# Altium PCB PCB2.PcbDoc
Units mil, origin at the board's own origin, x right, y up, seen from the top; angles counter-clockwise.
Board outline 6000 x 4000 mil, 8 copper layers (Top Layer, Int1 (Sign), Int2 (GND), Int3 (Sign), Int4 (Sign), Int5 (PWR), Int6 (Sign), Bottom Layer), stack 60.424 mil thick; 77 components, 234 nets, 364 pads, 0 vias.
Unrouted connection lines stored in the file: 131.
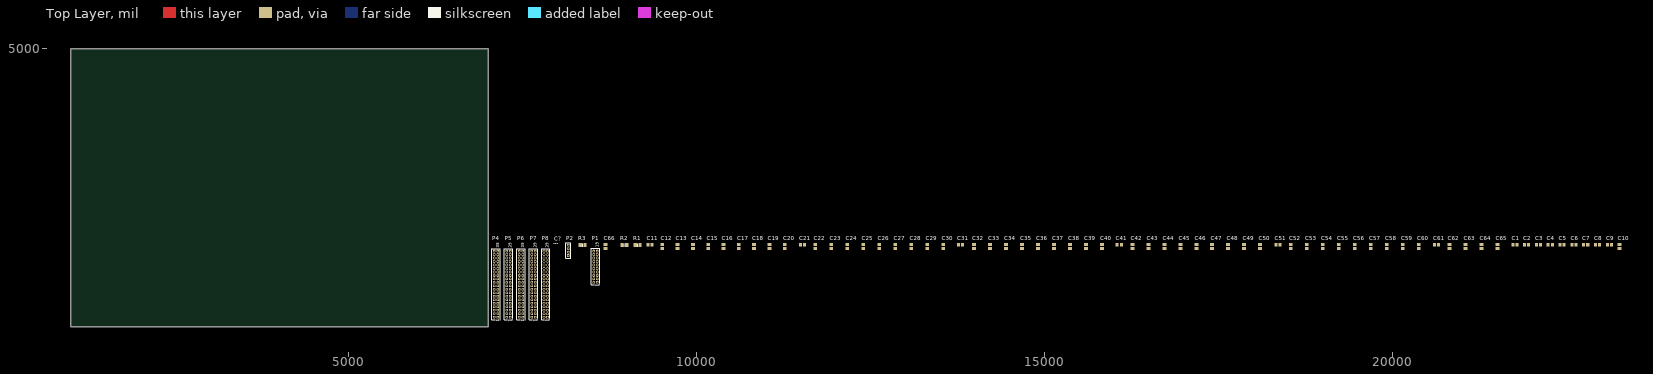
[diagram p0: Top Layer view]
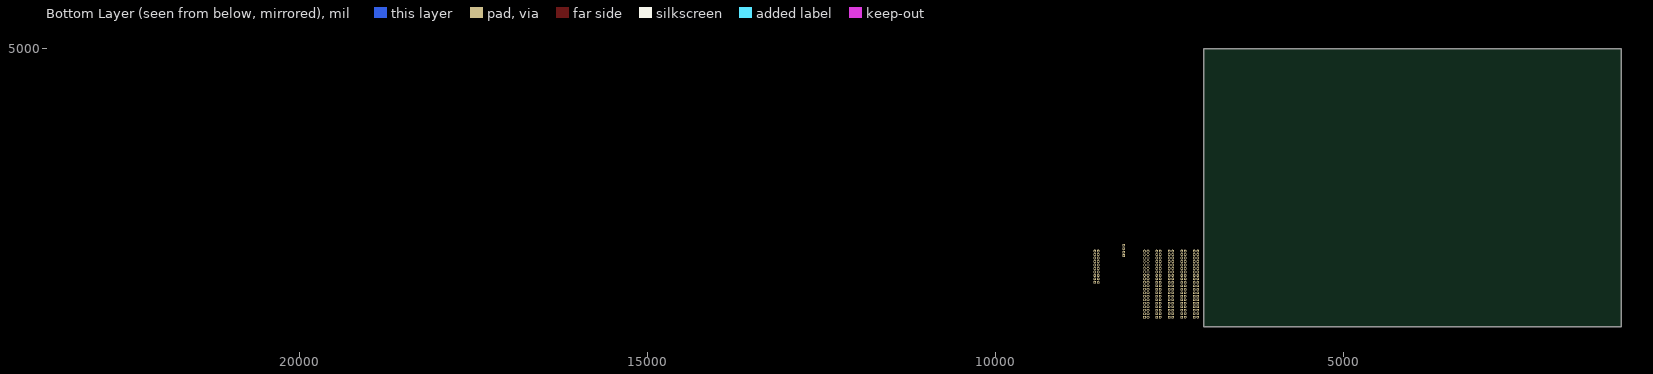
[diagram p1: Bottom Layer view, seen from below]
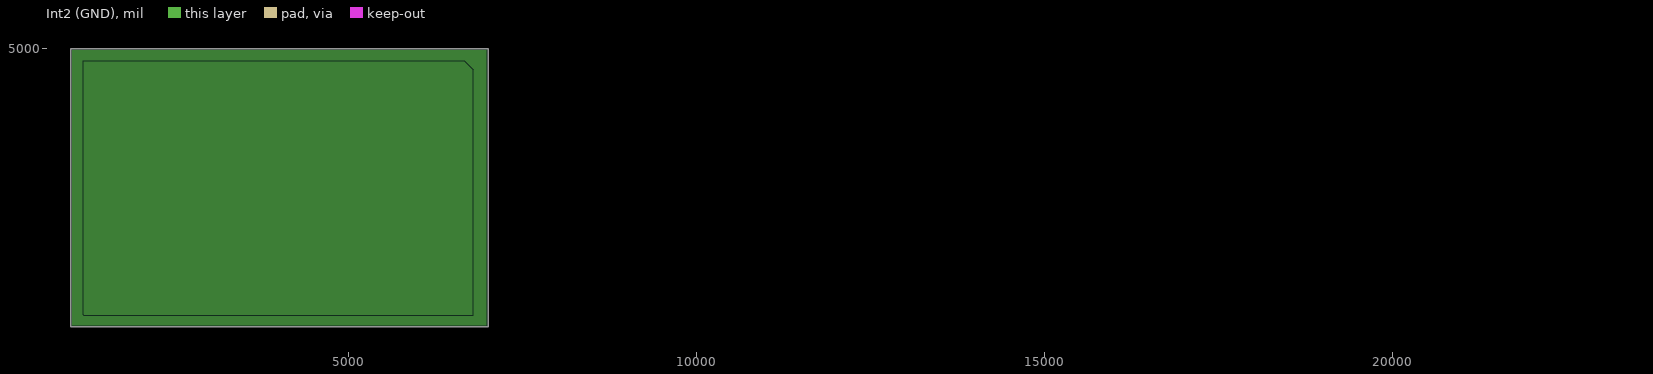
[diagram p2: Int2 (GND), clearances drawn from the general rule]
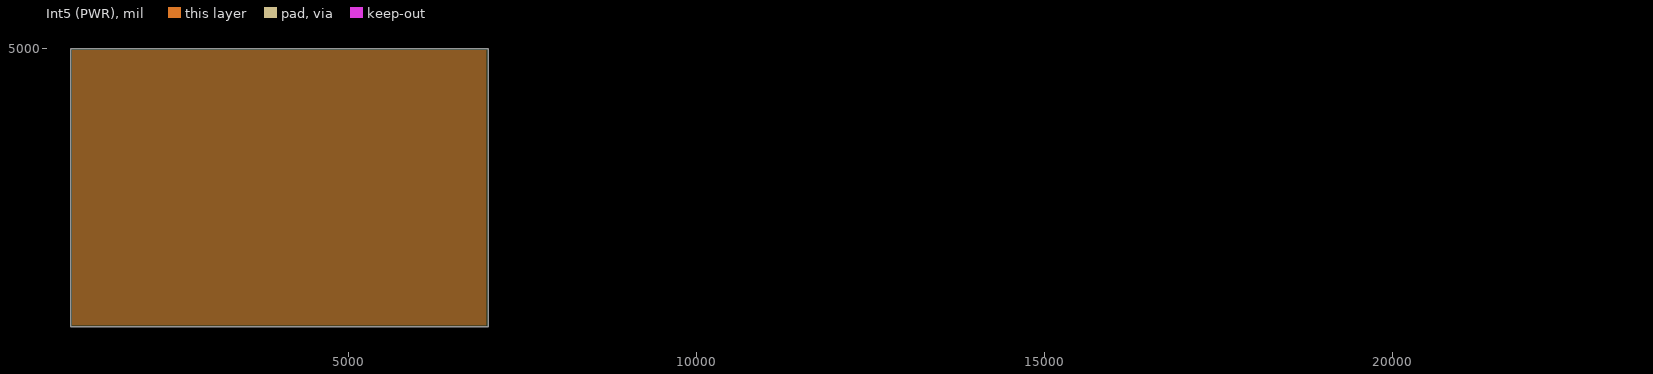
[diagram p3: Int5 (PWR), clearances drawn from the general rule]

## Layer stack, top to bottom
Top Solder: solder mask 1, SM-001, Dk 4
Top Layer: signal copper 1.378
Dielectric 1: prepreg 2.8, PP-006, Dk 4.1
Dielectric 2: prepreg 2.8, PP-006, Dk 4.1
Int1 (Sign): signal copper 1.378
Dielectric 3: core 9, Core-027, Dk 4.5
Int2 (GND): plane copper 1.378
Dielectric 4: prepreg 2.8, PP-006, Dk 4.1
Dielectric 5: prepreg 2.8, PP-006, Dk 4.1
Int3 (Sign): signal copper 1.378
Dielectric 6: core 9, Core-027, Dk 4.5
Int4 (Sign): signal copper 1.378
Dielectric 7: prepreg 2.8, PP-006, Dk 4.1
Dielectric 8: prepreg 2.8, PP-006, Dk 4.1
Int5 (PWR): plane copper 1.378
Dielectric 9: core 9, Core-027, Dk 4.5
Int6 (Sign): signal copper 1.378
Dielectric 10: prepreg 2.8, PP-006, Dk 4.1
Dielectric 11: prepreg 2.8, PP-006, Dk 4.1
Bottom Layer: signal copper 1.378
Bottom Solder: solder mask 1, SM-001, Dk 4

## Board outline
1000,1000 7000,1000 7000,5000 1000,5000

## Design rules (kind name [scope] priority, off if disabled: settings)
Clearance [All] p1: gap=10 ignorepadtopadclearanceinfootprint=FALSE except(0: Arc-Hole Track-Hole SMDPad-Hole THPad-Hole Via-Hole Fill-Hole Poly-Hole Region-Hole Text-Hole)
PlaneClearance [All] p1: clearance=20
PlaneConnect [All] p1: planeconnectstyle=Relief reliefexpansion=20 reliefentries=4 reliefconductorwidth=10 reliefairgap=10
PolygonConnect [All] p1: connectstyle=Relief reliefconductorwidth=10 reliefentries=4 polygonreliefangle="90 Angle" airgapwidth=10
RoomDefinition SlaveBoard_2020 [InComponentClass('SlaveBoard_2020')] p1: confinementstyle=ConfineIn formatcopy=TRUE lockcomponents=FALSE outline 7045,1060 23410,1060 23410,2320 7045,2320
RoutingVias [All] p1: holewidth=28 width=50 viastyle="Through Hole" minholewidth=28 minwidth=50 maxholewidth=28 maxwidth=50
SolderMaskExpansion [All] p1: expansion=4 istentingtop=FALSE
Width [All] p1: maxlimit=10 minlimit=10 preferedwidth=10
28 further rules are at their usual default settings.

## Components (designator, comment, footprint, x,y, rotation, side; value= is the part's Value field where it differs from the comment)
C1 "30pF" c0805 21765,2180 r0 top
C2 "30pF" c0805 21930,2180 r0 top
C3 "30pF" c0805 22100,2180 r0 top
C4 "30pF" c0805 22270,2180 r0 top
C5 "30pF" c0805 22440,2180 r0 top
C6 "30pF" c0805 22610,2180 r0 top
C7 "30pF" c0805 22780,2180 r0 top
C8 "30pF" c0805 22950,2180 r0 top
C9 "30pF" c0805 23120,2180 r0 top
C10 "30pF" c0805 23265,2155 r90 top
C11 "100nF" c0805 9330,2180 r0 top
C12 "100nF" c0805 9505,2155 r90 top
C13 "100nF" c0805 9725,2155 r90 top
C14 "100nF" c0805 9945,2155 r90 top
C15 "100nF" c0805 10165,2155 r90 top
C16 "100nF" c0805 10385,2155 r90 top
C17 "100nF" c0805 10605,2155 r90 top
C18 "100nF" c0805 10825,2155 r90 top
C19 "100nF" c0805 11045,2155 r90 top
C20 "100nF" c0805 11265,2155 r90 top
C21 "100nF" c0805 11520,2180 r0 top
C22 "100nF" c0805 11705,2155 r90 top
C23 "100nF" c0805 11935,2155 r90 top
C24 "100nF" c0805 12165,2155 r90 top
C25 "100nF" c0805 12395,2155 r90 top
C26 "100nF" c0805 12625,2155 r90 top
C27 "100nF" c0805 12855,2155 r90 top
C28 "100nF" c0805 13085,2155 r90 top
C29 "100nF" c0805 13315,2155 r90 top
C30 "100nF" c0805 13545,2155 r90 top
C31 "100nF" c0805 13795,2180 r0 top
C32 "100nF" c0805 13985,2155 r90 top
C33 "100nF" c0805 14215,2155 r90 top
C34 "100nF" c0805 14445,2155 r90 top
C35 "100nF" c0805 14675,2155 r90 top
C36 "100nF" c0805 14905,2155 r90 top
C37 "100nF" c0805 15135,2155 r90 top
C38 "100nF" c0805 15365,2155 r90 top
C39 "100nF" c0805 15595,2155 r90 top
C40 "100nF" c0805 15825,2155 r90 top
C41 "100nF" c0805 16075,2180 r0 top
C42 "100nF" c0805 16265,2155 r90 top
C43 "100nF" c0805 16495,2155 r90 top
C44 "100nF" c0805 16725,2155 r90 top
C45 "100nF" c0805 16955,2155 r90 top
C46 "100nF" c0805 17185,2155 r90 top
C47 "100nF" c0805 17410,2155 r90 top
C48 "100nF" c0805 17640,2155 r90 top
C49 "100nF" c0805 17870,2155 r90 top
C50 "100nF" c0805 18100,2155 r90 top
C51 "100nF" c0805 18355,2180 r0 top
C52 "100nF" c0805 18540,2155 r90 top
C53 "100nF" c0805 18770,2155 r90 top
C54 "100nF" c0805 19000,2155 r90 top
C55 "100nF" c0805 19230,2155 r90 top
C56 "100nF" c0805 19460,2155 r90 top
C57 "100nF" c0805 19690,2155 r90 top
C58 "100nF" c0805 19920,2155 r90 top
C59 "100nF" c0805 20150,2155 r90 top
C60 "100nF" c0805 20380,2155 r90 top
C61 "100nF" c0805 20635,2180 r0 top
C62 "100nF" c0805 20820,2155 r90 top
C63 "100nF" c0805 21050,2155 r90 top
C64 "100nF" c0805 21280,2155 r90 top
C65 "100nF" c0805 21510,2155 r90 top
C66 "100nF" c0805 8690,2155 r90 top
C? "10uF" 0603 7985,2200 r0 top
P1 "MHDR2X10" MHDR2X10 8570,1640 r90 top
P2 "MHDR1X4" MHDR1X4 8155,2025 r90 top
P4 "MHDR2X20" MHDR2X20 7140,1140 r90 top
P5 "MHDR2X20" MHDR2X20 7320,1140 r90 top
P6 "MHDR2X20" MHDR2X20 7500,1140 r90 top
P7 "MHDR2X20" MHDR2X20 7680,1140 r90 top
P8 "MHDR2X20" MHDR2X20 7855,1140 r90 top
R1 "10K" 6-0805_N 9150,2175 r0 top value=100K
R2 "10K" 6-0805_N 8960,2175 r0 top
R3 "10k" 6-0805_N 8360,2175 r0 top

## Footprints (in the part's own frame and the unit in brackets; to place one, negate y for a bottom-side part, rotate by r counter-clockwise, add the part's x,y. Pads: shape width x height; smd on the part's side, far side on the other; paste and mask are expansions set on the pad)
6-0805_N [mm] "Chip Resistor, Body 2.0x1.2mm, IPC Medium Density"
  rect 1.2x1.4 smd: 1(-0.9,0) 2(0.9,0)
  silkscreen extent 0,-0.6 0,0.6, body extent -1.07,-0.7 1.07,0.7, height 0.7
0603 [mm] "Chip Inductor, Body 0.6x0.3mm, IPC High Density"
  rect 0.5x0.3 smd: 1(-0.35,0) 2(0.35,0)
  silkscreen extent -0.9,-0.05 -0.9,0.05, body extent -0.33,-0.18 0.33,0.18, height 0.55
c0805 [mm] "Chip Capacitor, Body 2.0x1.3mm, IPC High Density"
  rect 1.1x1.4 smd: 1(-0.75,0) 2(0.75,0)
  body extent -1.1,-0.72 1.1,0.72, height 1.4
MHDR1X4 [mm] "Connector; Header; 4 Position"
  rect 1x1 hole 0.6: 1(0,0)
  round 1 hole 0.6: 2(1.27,0) 3(2.54,0) 4(3.81,0)
  silkscreen extent -0.9,-0.9 4.71,0.9
MHDR2X10 [mm] "Connector; Header; 10x2 Position"
  rect 1x1 hole 0.6: 1(0,0)
  round 1 hole 0.6: 2(0,1.27) 3(1.27,0) 4(1.27,1.27) 5(2.54,0) 6(2.54,1.27) 7(3.81,0) 8(3.81,1.27) 9(5.08,0) 10(5.08,1.27) 11(6.35,0) 12(6.35,1.27) 13(7.62,0) 14(7.62,1.27) 15(8.89,0) 16(8.89,1.27) 17(10.16,0) 18(10.16,1.27) 19(11.43,0) 20(11.43,1.27)
  silkscreen extent -0.9,-0.9 12.43,2.17
MHDR2X20 [mm] "Connector; Header; 20x2 Position"
  rect 1x1 hole 0.6: 1(0,0)
  round 1 hole 0.6: 2(0,1.27) 3(1.27,0) 4(1.27,1.27) 5(2.54,0) 6(2.54,1.27) 7(3.81,0) 8(3.81,1.27) 9(5.08,0) 10(5.08,1.27) 11(6.35,0) 12(6.35,1.27) 13(7.62,0) 14(7.62,1.27) 15(8.89,0) 16(8.89,1.27) 17(10.16,0) 18(10.16,1.27) 19(11.43,0) 20(11.43,1.27) 21(12.7,0) 22(12.7,1.27) 23(13.97,0) 24(13.97,1.27) 25(15.24,0) 26(15.24,1.27) 27(16.51,0) 28(16.51,1.27) 29(17.78,0) 30(17.78,1.27) 31(19.05,0) 32(19.05,1.27) 33(20.32,0) 34(20.32,1.27) 35(21.59,0) 36(21.59,1.27) 37(22.86,0) 38(22.86,1.27) 39(24.13,0) 40(24.13,1.27)
  silkscreen extent -0.9,-0.9 25.03,2.17

## Part data
C1 C2 C3 C4 C5 C6 C7 C8 C9 C10: library part CP1
C11 C12 C13 C14 C15 C16 C17 C18 C19 C20 C21 C22 C23 C24 C25 C26 C27 C28 C29 C30 C31 C32 C33 C34 C35 C36 C37 C38 C39 C40 C41 C42 C43 C44 C45 C46 C47 C48 C49 C50 C51 C52 C53 C54 C55 C56 C57 C58 C59 C60 C61 C62 C63 C64 C65: library part Cap_0805
C66 C?: library part C
P1: "Header, 10-Pin, Dual row", LatestRevisionDate=17-Jul-2002, LatestRevisionNote="Re-released for DXP Platform.", Publisher="Altium Limited"
P2: "Header, 4-Pin", LatestRevisionDate=17-Jul-2002, LatestRevisionNote="Re-released for DXP Platform.", Publisher="Altium Limited"
P4 P5 P6 P7 P8: "Header, 20-Pin, Dual row", LatestRevisionDate=17-Jul-2002, LatestRevisionNote="Re-released for DXP Platform.", Publisher="Altium Limited"
R1 R2 R3: library part R

## Nets (pads, with @x,y where several pads share a name; then routed paths per layer and width w, separated by ;. In a path a pad name is that pad's centre, name@x,y a point inside that pad or via, vN(x,y) a via of type N, cw(c..) or ccw(c..) an arc to the next point about the centre after c; other vN are vias at no path point)
1_AD1_IN1: P4.1
1_AD1_IN2: P4.3
1_AD1_IN3: P4.5
1_AD1_IN4: P4.7
1_AD1_IN5: P4.9
1_AD1_IN6: P4.11
1_AD1_IN7: P4.13
1_AD1_IN8: P4.15
1_AD1_IN9: P4.17
1_AD1_IN10: P4.19
1_AD1_IN14: P4.21
1_AD2_IN1: P4.23
1_AD2_IN2: P4.25
1_AD2_IN3: P4.27
1_AD2_IN4: P4.29
1_AD2_IN5: P4.31
1_AD2_IN11: P4.33
1_AD2_IN12: P4.35
1_AD3_IN1: P4.37
1_AD3_IN2: P4.39
1_AD3_IN3: P4.2
1_AD3_IN5: P4.4
1_AD3_IN6: P4.6
1_AD3_IN7: P4.8
1_AD3_IN8: P4.10
1_AD3_IN9: P4.12
1_AD3_IN10: P4.14
1_AD3_IN11: P4.16
1_AD3_IN12: P4.18
1_AD3_IN13: P4.20
1_AD3_IN14: P4.22
1_AD3_IN15: P4.24
1_AD3_IN16: P4.26
1_AD4_IN1: P4.28
1_AD4_IN2: P4.30
1_AD4_IN3: P4.32
1_AD4_IN4: P4.34
1_AD4_IN5: P4.36
1_AD4_IN12: P4.38
1_AD4_IN13: P4.40
1_BOOT0: R1.2
1_NRST: C66.1 R2.1
1_SPI_MISO: P1.3
1_SPI_MOSI: P1.5
1_SPI_SCK: P1.1
1_SWCLK: P2.1
1_SWDIO: P2.2 R3.2
2_AD1_IN1: P5.1
2_AD1_IN2: P5.3
2_AD1_IN3: P5.5
2_AD1_IN4: P5.7
2_AD1_IN5: P5.9
2_AD1_IN6: P5.11
2_AD1_IN7: P5.13
2_AD1_IN8: P5.15
2_AD1_IN9: P5.17
2_AD1_IN10: P5.19
2_AD1_IN14: P5.21
2_AD2_IN1: P5.23
2_AD2_IN2: P5.25
2_AD2_IN3: P5.27
2_AD2_IN4: P5.29
2_AD2_IN5: P5.31
2_AD2_IN11: P5.33
2_AD2_IN12: P5.35
2_AD3_IN1: P5.37
2_AD3_IN2: P5.39
2_AD3_IN3: P5.2
2_AD3_IN5: P5.4
2_AD3_IN6: P5.6
2_AD3_IN7: P5.8
2_AD3_IN8: P5.10
2_AD3_IN9: P5.12
2_AD3_IN10: P5.14
2_AD3_IN11: P5.16
2_AD3_IN12: P5.18
2_AD3_IN13: P5.20
2_AD3_IN14: P5.22
2_AD3_IN15: P5.24
2_AD3_IN16: P5.26
2_AD4_IN1: P5.28
2_AD4_IN2: P5.30
2_AD4_IN3: P5.32
2_AD4_IN4: P5.34
2_AD4_IN5: P5.36
2_AD4_IN12: P5.38
2_AD4_IN13: P5.40
2_SPI_MISO: P1.11
2_SPI_MOSI: P1.13
2_SPI_SCK: P1.9
3.3V: C11.1 C12.1 C13.1 C14.1 C15.1 C16.1 C17.1 C18.1 C19.1 C20.1 C21.1 C22.1 C23.1 C24.1 C25.1 C26.1 C27.1 C28.1 C29.1 C30.1 C31.1 C32.1 C33.1 C34.1 C35.1 C36.1 C37.1 C38.1 C39.1 C40.1 C41.1 C42.1 C43.1 C44.1 C45.1 C46.1 C47.1 C48.1 C49.1 C50.1 C51.1 C52.1 C53.1 C54.1 C55.1 C56.1 C57.1 C58.1 C59.1 C60.1 C61.1 C62.1 C63.1 C64.1 C65.1 P2.3 R2.2 R3.1
3_AD1_IN1: P6.1
3_AD1_IN2: P6.3
3_AD1_IN3: P6.5
3_AD1_IN4: P6.7
3_AD1_IN5: P6.9
3_AD1_IN6: P6.11
3_AD1_IN7: P6.13
3_AD1_IN8: P6.15
3_AD1_IN9: P6.17
3_AD1_IN10: P6.19
3_AD1_IN14: P6.21
3_AD2_IN1: P6.23
3_AD2_IN2: P6.25
3_AD2_IN3: P6.27
3_AD2_IN4: P6.29
3_AD2_IN5: P6.31
3_AD2_IN11: P6.33
3_AD2_IN12: P6.35
3_AD3_IN1: P6.37
3_AD3_IN2: P6.39
3_AD3_IN3: P6.2
3_AD3_IN5: P6.4
3_AD3_IN6: P6.6
3_AD3_IN7: P6.8
3_AD3_IN8: P6.10
3_AD3_IN9: P6.12
3_AD3_IN10: P6.14
3_AD3_IN11: P6.16
3_AD3_IN12: P6.18
3_AD3_IN13: P6.20
3_AD3_IN14: P6.22
3_AD3_IN15: P6.24
3_AD3_IN16: P6.26
3_AD4_IN1: P6.28
3_AD4_IN2: P6.30
3_AD4_IN3: P6.32
3_AD4_IN4: P6.34
3_AD4_IN5: P6.36
3_AD4_IN12: P6.38
3_AD4_IN13: P6.40
3_SPI_MISO: P1.19
3_SPI_MOSI: P1.20
3_SPI_SCK: P1.17
4_AD1_IN1: P7.1
4_AD1_IN2: P7.3
4_AD1_IN3: P7.5
4_AD1_IN4: P7.7
4_AD1_IN5: P7.9
4_AD1_IN6: P7.11
4_AD1_IN7: P7.13
4_AD1_IN8: P7.15
4_AD1_IN9: P7.17
4_AD1_IN10: P7.19
4_AD1_IN14: P7.21
4_AD2_IN1: P7.23
4_AD2_IN2: P7.25
4_AD2_IN3: P7.27
4_AD2_IN4: P7.29
4_AD2_IN5: P7.31
4_AD2_IN11: P7.33
4_AD2_IN12: P7.35
4_AD3_IN1: P7.37
4_AD3_IN2: P7.39
4_AD3_IN3: P7.2
4_AD3_IN5: P7.4
4_AD3_IN6: P7.6
4_AD3_IN7: P7.8
4_AD3_IN8: P7.10
4_AD3_IN9: P7.12
4_AD3_IN10: P7.14
4_AD3_IN11: P7.16
4_AD3_IN12: P7.18
4_AD3_IN13: P7.20
4_AD3_IN14: P7.22
4_AD3_IN15: P7.24
4_AD3_IN16: P7.26
4_AD4_IN1: P7.28
4_AD4_IN2: P7.30
4_AD4_IN3: P7.32
4_AD4_IN4: P7.34
4_AD4_IN5: P7.36
4_AD4_IN12: P7.38
4_AD4_IN13: P7.40
4_SPI_MISO: P1.14
4_SPI_MOSI: P1.16
4_SPI_SCK: P1.12
5_AD1_IN1: P8.1
5_AD1_IN2: P8.3
5_AD1_IN3: P8.5
5_AD1_IN4: P8.7
5_AD1_IN5: P8.9
5_AD1_IN6: P8.11
5_AD1_IN7: P8.13
5_AD1_IN8: P8.15
5_AD1_IN9: P8.17
5_AD1_IN10: P8.19
5_AD1_IN14: P8.21
5_AD2_IN1: P8.23
5_AD2_IN2: P8.25
5_AD2_IN3: P8.27
5_AD2_IN4: P8.29
5_AD2_IN5: P8.31
5_AD2_IN11: P8.33
5_AD2_IN12: P8.35
5_AD3_IN1: P8.37
5_AD3_IN2: P8.39
5_AD3_IN3: P8.2
5_AD3_IN5: P8.4
5_AD3_IN6: P8.6
5_AD3_IN7: P8.8
5_AD3_IN8: P8.10
5_AD3_IN9: P8.12
5_AD3_IN10: P8.14
5_AD3_IN11: P8.16
5_AD3_IN12: P8.18
5_AD3_IN13: P8.20
5_AD3_IN14: P8.22
5_AD3_IN15: P8.24
5_AD3_IN16: P8.26
5_AD4_IN1: P8.28
5_AD4_IN2: P8.30
5_AD4_IN3: P8.32
5_AD4_IN4: P8.34
5_AD4_IN5: P8.36
5_AD4_IN12: P8.38
5_AD4_IN13: P8.40
5_SPI_MISO: P1.6
5_SPI_MOSI: P1.8
5_SPI_SCK: P1.4
GND: C1.2 C2.2 C3.2 C4.2 C5.2 C6.2 C7.2 C8.2 C9.2 C10.2 C11.2 C12.2 C13.2 C14.2 C15.2 C16.2 C17.2 C18.2 C19.2 C20.2 C21.2 C22.2 C23.2 C24.2 C25.2 C26.2 C27.2 C28.2 C29.2 C30.2 C31.2 C32.2 C33.2 C34.2 C35.2 C36.2 C37.2 C38.2 C39.2 C40.2 C41.2 C42.2 C43.2 C44.2 C45.2 C46.2 C47.2 C48.2 C49.2 C50.2 C51.2 C52.2 C53.2 C54.2 C55.2 C56.2 C57.2 C58.2 C59.2 C60.2 C61.2 C62.2 C63.2 C64.2 C65.2 C66.2 P1.2 P1.7 P1.10 P1.15 P1.18 P2.4 R1.1
NetC1_1: C1.1
NetC2_1: C2.1
NetC3_1: C3.1
NetC4_1: C4.1
NetC5_1: C5.1
NetC6_1: C6.1
NetC7_1: C7.1
NetC8_1: C8.1
NetC9_1: C9.1
NetC10_1: C10.1
NetC?_1: C?.1
NetC?_2: C?.2
NetL1_1: 

## Polygon pours and split planes (outlines as drawn)
no net on Int5 (PWR) (split plane): 6979.9,1020.1 1020.1,1020.1 1020.1,4979.9 6979.9,4979.9
no net on Int2 (GND) (split plane): 6979.9,1020.1 1020.1,1020.1 1020.1,4979.9 6979.9,4979.9

## Other copper
Int2 (GND) (plane layer: these items are gaps in the copper):
  lines w0: 1180,1175 1190,1165 6785,1165 6790,1170 6790,4695 6660,4825 1180,4825 1180,1175

## Text inside footprints (layer, text, board x,y; h text height)
P1: Top Overlay "1" at 8590,1577.01 h39.37 r90; Top Overlay "19" at 8590,2147.87 h39.37 r90
P4: Top Overlay "39" at 7160,2140 h39.37 r90; Top Overlay "1" at 7160,1077.01 h39.37 r90
P5: Top Overlay "39" at 7340,2140 h39.37 r90; Top Overlay "1" at 7340,1077.01 h39.37 r90
P6: Top Overlay "39" at 7520,2140 h39.37 r90; Top Overlay "1" at 7520,1077.01 h39.37 r90
P7: Top Overlay "39" at 7700,2140 h39.37 r90; Top Overlay "1" at 7700,1077.01 h39.37 r90
P8: Top Overlay "39" at 7875,2140 h39.37 r90; Top Overlay "1" at 7875,1077.01 h39.37 r90